# EAGLE board Atmega32A (EAGLE 8.0.1)
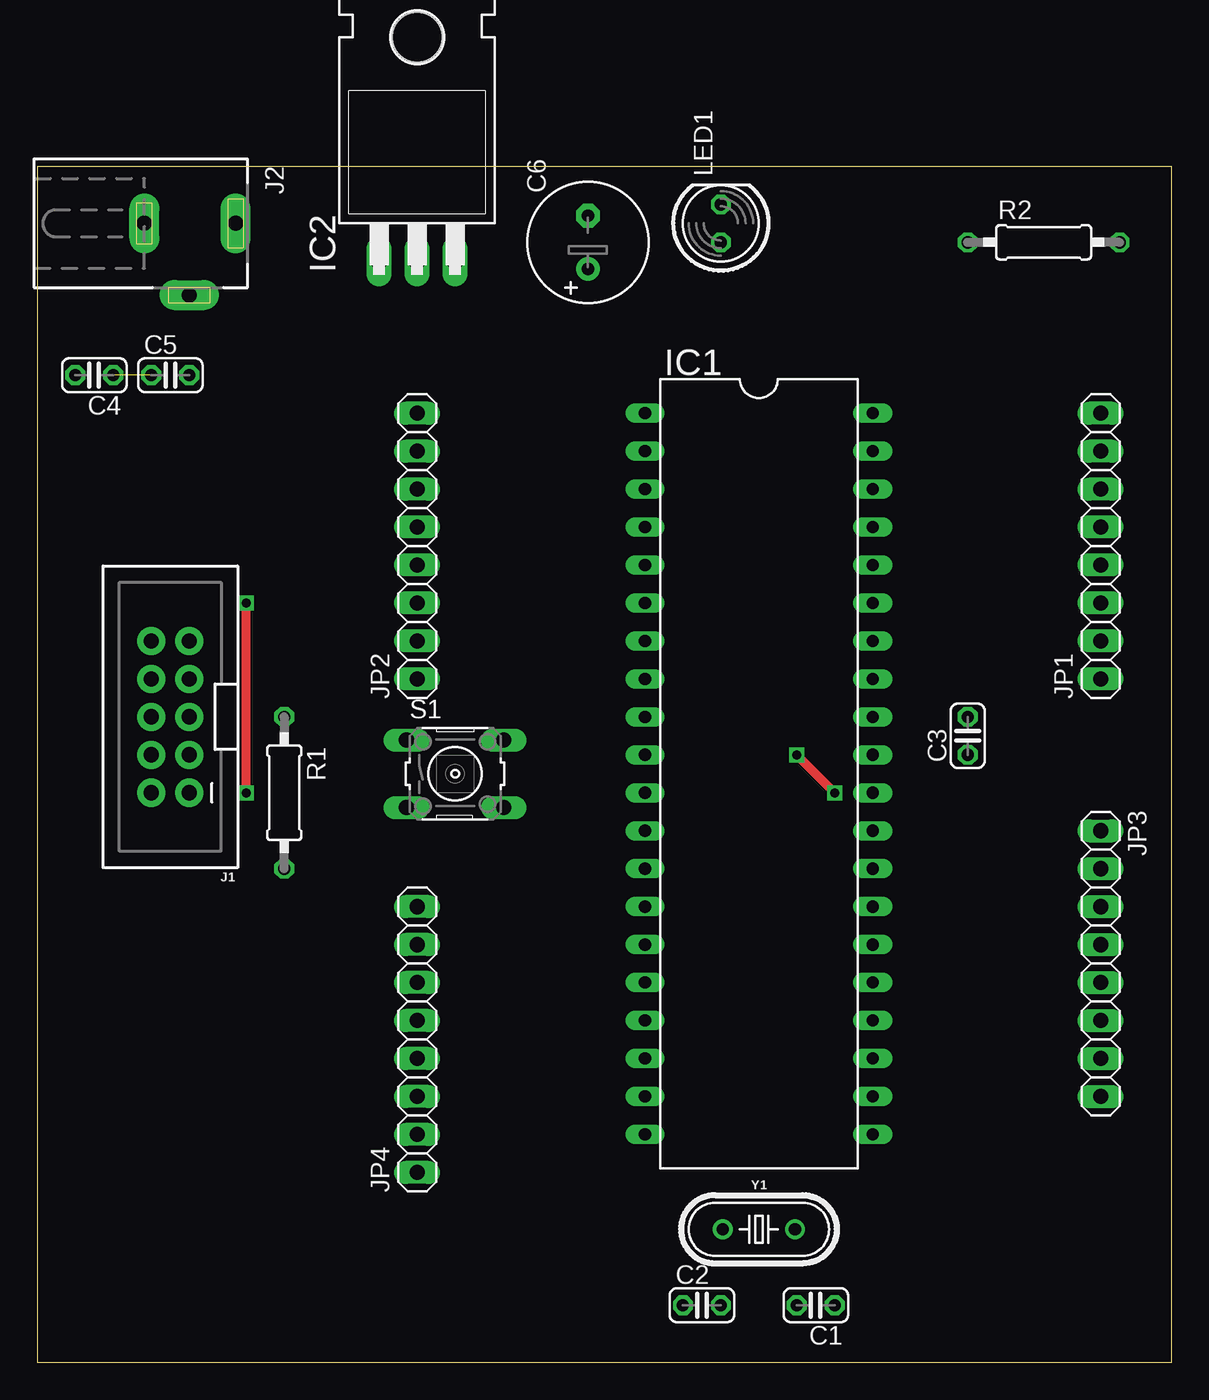
[diagram p0: board, top side]
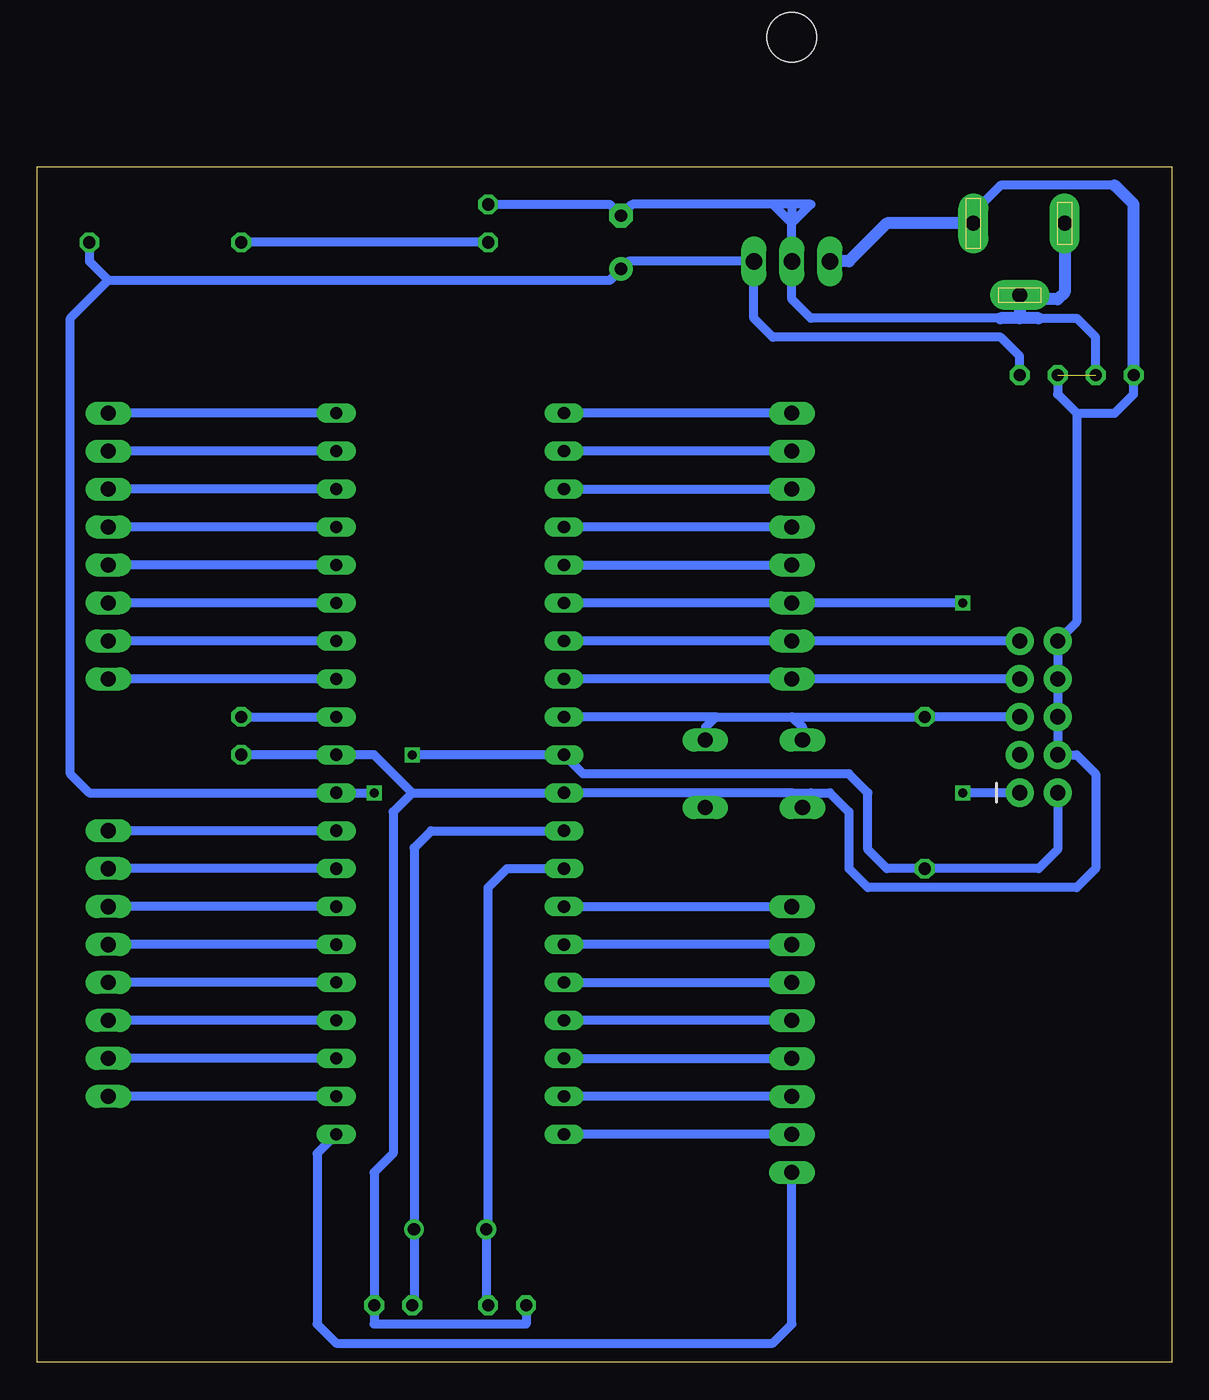
[diagram p1: board, bottom side, seen from below]

Size 75.87 x 80 mm. Coordinates in mm from the lower left corner, seen from the top.
Outline: 0,0 75.87,0 75.87,80 0,80 0,0
Copper layers (1*16): Top 0.035mm / dielectric 1.5mm / Bottom 0.035mm
Design rules "default": minimum track width 10mil, minimum drill 24mil, track to track 8mil, track to pad 8mil, pad to pad 8mil, via to via 8mil, smd to smd 8mil, copper to edge 40mil, drill to drill 8mil, minimum pad ring 10mil, minimum via ring 8mil, stop-mask expansion 4mil, vias tented up to drill 0mil, thermal gap 10mil

## Footprints (pad centres in the part's own frame; a part is rotated, then mirrored left to right if it is on the bottom)
C025-024X044 = drill 0.813 octagon: 1 -1.27,0; 2 1.27,0
E3,5-8 = drill 0.813 pad 1.6: + -1.778,0 | drill 0.813 pad 1.6 octagon: - 1.778,0
DIL40 = drill 0.813 long: 1 -24.13,-7.62; 2 -21.59,-7.62; 3 -19.05,-7.62; 4 -16.51,-7.62; 5 -13.97,-7.62; 6 -11.43,-7.62; 7 -8.89,-7.62; 8 -6.35,-7.62; 9 -3.81,-7.62; 10 -1.27,-7.62; 11 1.27,-7.62; 12 3.81,-7.62; 13 6.35,-7.62; 14 8.89,-7.62; 15 11.43,-7.62; 16 13.97,-7.62; 17 16.51,-7.62; 18 19.05,-7.62; 19 21.59,-7.62; 20 24.13,-7.62; 21 24.13,7.62; 22 21.59,7.62; 23 19.05,7.62; 24 16.51,7.62; 25 13.97,7.62; 26 11.43,7.62; 27 8.89,7.62; 28 6.35,7.62; 29 3.81,7.62; 30 1.27,7.62; 31 -1.27,7.62; 32 -3.81,7.62; 33 -6.35,7.62; 34 -8.89,7.62; 35 -11.43,7.62; 36 -13.97,7.62; 37 -16.51,7.62; 38 -19.05,7.62; 39 -21.59,7.62; 40 -24.13,7.62
TO220H = drill 1.118 long: 1 -2.54,-10.16; 2 0,-10.16; 3 2.54,-10.16 | hole 3.302: 0,4.826
2X5-SHROUDED = drill 1.016 pad 1.88: 1 -1.27,5.08; 2 1.27,5.08; 3 -1.27,2.54; 4 1.27,2.54; 5 -1.27,0; 6 1.27,0; 7 -1.27,-2.54; 8 1.27,-2.54; 9 -1.27,-5.08; 10 1.27,-5.08
DCJ0202 = drill 1 pad 2 long: 1 0,3.1; 2 4.8,0; 3 0,-3
1X08 = drill 1.016 long: 1 -8.89,0; 2 -6.35,0; 3 -3.81,0; 4 -1.27,0; 5 1.27,0; 6 3.81,0; 7 6.35,0; 8 8.89,0
LED5MM = drill 0.813 octagon: A -1.27,0; K 1.27,0
0207/10 = drill 0.813 octagon: 1 -5.08,0; 2 5.08,0
B3F-10XX = drill 1.016 long: 1 -3.251,2.261; 2 3.251,2.261; 3 -3.251,-2.261; 4 3.251,-2.261
HC49U = drill 0.813: 1 -2.413,0; 2 2.413,0

## Placement (x,y rotation side)
C1  [C025-024X044]  52.07,3.81 180 top
C2  [C025-024X044]  44.45,3.81 0 top
C3  [C025-024X044]  62.23,41.91 90 top
C4  [C025-024X044]  3.81,66.04 180 top
C5  [C025-024X044]  8.89,66.04 0 top
C6  [E3,5-8]  36.83,74.93 90 top
IC1  MEGA32-P  [DIL40]  48.26,39.37 270 top
IC2  7805T  [TO220H]  25.4,83.82 0 top
J1  AVR_SPI_PROG_5X2PTH2  [2X5-SHROUDED]  8.89,43.18 180 top
J2  DCJ0202  [DCJ0202]  10.16,76.2 270 top
JP1  [1X08]  71.12,54.61 90 top
JP2  [1X08]  25.4,54.61 90 top
JP3  [1X08]  71.12,26.67 270 top
JP4  [1X08]  25.4,21.59 90 top
LED1  [LED5MM]  45.72,76.2 90 top
R1  [0207/10]  16.51,38.1 270 top
R2  [0207/10]  67.31,74.93 0 top
S1  [B3F-10XX]  27.94,39.37 0 top
Y1  [HC49U]  48.26,8.89 0 top

## Library data of the parts
C1-C6 R1 R2 = rcl
IC1 = atmel; MPN: ATMEGA32-16PU; OC_FARNELL: 1661729; OC_NEWARK: 51P1794
IC2 = linear
J1 = SparkFun-Connectors; PROD_ID: CONN-08671; SF_ID: PRT-08506
J2 = con-jack; OC_FARNELL: unknown; OC_NEWARK: unknown
JP1-JP4 = pinhead
LED1 = led
S1 = switch-omron; MPN: B3F-1000; OC_FARNELL: 176432; OC_NEWARK: 36M3542
Y1 = SparkFun-Clocks

## Nets
GND: C1.1 C2.1 C3.1 C4.1 C5.1 C6.- IC1.11 IC1.31 IC2.2 J1.4 J1.6 J1.8 J1.10 J2.2 J2.3 LED1.K S1.3 S1.4
MISO: IC1.7 J1.9 JP2.2
MOSI: IC1.6 J1.1 JP2.3
N$1: C2.2 IC1.13 Y1.1
N$2: C1.2 IC1.12 Y1.2
N$3: LED1.A R2.1
N$4: C3.2 IC1.32
N$5: C4.2 IC2.1 J2.1
N$7: IC1.33 JP1.1
N$8: IC1.34 JP1.2
N$10: IC1.35 JP1.3
N$11: IC1.36 JP1.4
N$12: IC1.37 JP1.5
N$13: IC1.38 JP1.6
N$14: IC1.39 JP1.7
N$15: IC1.40 JP1.8
N$19: IC1.5 JP2.4
N$20: IC1.4 JP2.5
N$21: IC1.3 JP2.6
N$22: IC1.2 JP2.7
N$23: IC1.1 JP2.8
N$24: IC1.29 JP3.1
N$25: IC1.28 JP3.2
N$26: IC1.27 JP3.3
N$27: IC1.26 JP3.4
N$28: IC1.25 JP3.5
N$29: IC1.24 JP3.6
N$30: IC1.23 JP3.7
N$31: IC1.22 JP3.8
N$32: IC1.21 JP4.1
N$33: IC1.20 JP4.2
N$34: IC1.19 JP4.3
N$35: IC1.18 JP4.4
N$36: IC1.17 JP4.5
N$37: IC1.16 JP4.6
N$38: IC1.15 JP4.7
N$39: IC1.14 JP4.8
RESET: IC1.9 J1.5 R1.1 S1.1 S1.2
SCK: IC1.8 J1.7 JP2.1
VCC: C5.2 C6.+ IC1.10 IC1.30 IC2.3 J1.2 R1.2 R2.2

## Tracks (layer width: path | path; a pad name or v marks a point on that pad's centre or on a via)
GND  (1 unrouted)
  Bottom 0.61: C2.1 43.18,2.54 53.34,2.54 C1.1 53.34,12.7 52.07,13.97 52.07,36.83 50.8,38.1 | 25.4,76.2 24.13,77.47 25.4,77.47 | 25.4,76.2 IC2.2 25.4,71.12 24.13,69.85 11.43,69.85 10.16,69.85 8.89,69.85 6.35,69.85 5.08,68.58 C4.1 | 26.67,77.47 25.4,76.2 | 26.67,77.47 36.07,77.47 C6.- 37.59,77.47 LED1.K | 25.4,77.47 26.67,77.47 | 50.8,38.1 IC1.11 31.75,38.1 | 50.8,38.1 53.34,40.64 IC1.31 C3.1 | C5.1 7.62,64.77 6.35,63.5 | 6.35,63.5 3.81,63.5 2.54,64.77 2.54,66.04 | 6.35,63.5 6.35,49.53 J1.10 J1.8 J1.6 J1.4 6.35,40.64 5.08,39.37 5.08,33.02 6.35,31.75 20.32,31.75 21.59,33.02 21.59,36.83 22.86,38.1 24.13,38.1 | 25.4,38.1 30.48,38.1 | 25.4,38.1 24.13,38.1 | 30.48,38.1 31.75,38.1 | 31.75,38.1 31.19,37.54 S1.4 31.19,37.39 30.48,38.1 | 24.13,38.1 24.69,37.54 S1.3 24.69,37.39 25.4,38.1 | 25.4,77.47 25.4,76.2
  Bottom 0.813: 10.16,69.85 J2.2 9.88,71.12 7.62,71.12 7.16,71.58 J2.3 | 8.89,69.85 11.43,69.85
MISO
  Bottom 0.61: IC1.7 JP2.2 J1.9
MOSI  (via drill 0.6)
  Top 0.61: v13.97,38.1 v13.97,50.8
  Bottom 0.61: IC1.6 JP2.3 v13.97,50.8 | J1.1 v13.97,38.1
N$1
  Bottom 0.61: IC1.13 44.45,33.02 45.72,31.75 45.72,8.89 Y1.1 45.85,3.94 C2.2
N$2
  Bottom 0.61: IC1.12 49.53,35.56 50.67,34.42 Y1.2 50.67,3.94 C1.2
N$3
  Bottom 0.61: LED1.A R2.1
N$4
  Bottom 0.61: C3.2 IC1.32
N$5
  Bottom 0.61: IC2.1 22.86,72.39 | 3.81,78.74 11.43,78.74 12.7,77.47 J2.1
  Bottom 0.813: J2.1 19.05,76.2 21.59,73.66 IC2.1 | C4.2 2.54,77.47 3.81,78.74
N$7
  Bottom 0.61: IC1.33 JP1.1
N$8
  Bottom 0.61: IC1.34 JP1.2
N$10
  Bottom 0.61: IC1.35 JP1.3
N$11
  Bottom 0.61: IC1.36 JP1.4
N$12
  Bottom 0.61: IC1.37 JP1.5
N$13
  Bottom 0.61: IC1.38 JP1.6
N$14
  Bottom 0.61: IC1.39 JP1.7
N$15
  Bottom 0.61: IC1.40 JP1.8
N$19
  Bottom 0.61: IC1.5 JP2.4
N$20
  Bottom 0.61: JP2.5 IC1.4
N$21
  Bottom 0.61: IC1.3 JP2.6
N$22
  Bottom 0.61: JP2.7 IC1.2
N$23
  Bottom 0.61: JP2.8 IC1.1
N$24
  Bottom 0.61: IC1.29 JP3.1
N$25
  Bottom 0.61: IC1.28 JP3.2
N$26
  Bottom 0.61: IC1.27 JP3.3
N$27
  Bottom 0.61: IC1.26 JP3.4
N$28
  Bottom 0.61: IC1.25 JP3.5
N$29
  Bottom 0.61: IC1.24 JP3.6
N$30
  Bottom 0.61: IC1.23 JP3.7
N$31
  Bottom 0.61: IC1.22 JP3.8
N$32
  Bottom 0.61: IC1.21 57.15,13.97 57.15,2.54 55.88,1.27 26.67,1.27 25.4,2.54 JP4.1
N$33
  Bottom 0.61: JP4.2 IC1.20
N$34
  Bottom 0.61: JP4.3 IC1.19
N$35
  Bottom 0.61: IC1.18 JP4.4
N$36
  Bottom 0.61: JP4.5 IC1.17
N$37
  Bottom 0.61: IC1.16 JP4.6
N$38
  Bottom 0.61: JP4.7 IC1.15
N$39
  Bottom 0.61: IC1.14 JP4.8
RESET
  Bottom 0.61: J1.5 R1.1 25.4,43.18 | 30.48,43.18 25.4,43.18 | 30.48,43.18 IC1.9 | S1.1 24.69,42.47 25.4,43.18 | S1.2 31.19,42.47 30.48,43.18 | S1.2 31.47,41.63 31.75,41.91 | S1.2 30.76,41.63 30.48,41.91 | S1.1 25.12,41.63 25.4,41.91 | S1.1 24.41,41.63 24.13,41.91
SCK
  Bottom 0.61: IC1.8 JP2.1 J1.7
VCC  (via drill 0.6)
  Top 0.61: v53.34,38.1 v50.8,40.64
  Bottom 0.61: 71.12,72.39 73.66,69.85 73.66,39.37 72.39,38.1 IC1.30 v53.34,38.1 | 71.12,72.39 37.59,72.39 C6.+ 36.32,73.66 IC2.3 27.94,69.85 26.67,68.58 11.43,68.58 10.16,67.31 C5.2 | J1.2 7.62,34.29 8.89,33.02 R1.2 19.05,33.02 20.32,34.29 20.32,38.1 21.59,39.37 39.37,39.37 IC1.10 v50.8,40.64 | R2.2 72.39,73.66 71.12,72.39